# Altium PCB PCB1.PcbDoc
Units mm, origin at the board's own origin, x right, y up, seen from the top; angles counter-clockwise.
Board outline 30 x 40 mm, 2 copper layers (Top Layer, Bottom Layer), stack 1.571 mm thick; 27 components, 28 nets, 104 pads, 15 vias.
Unrouted connection lines stored in the file: 43.
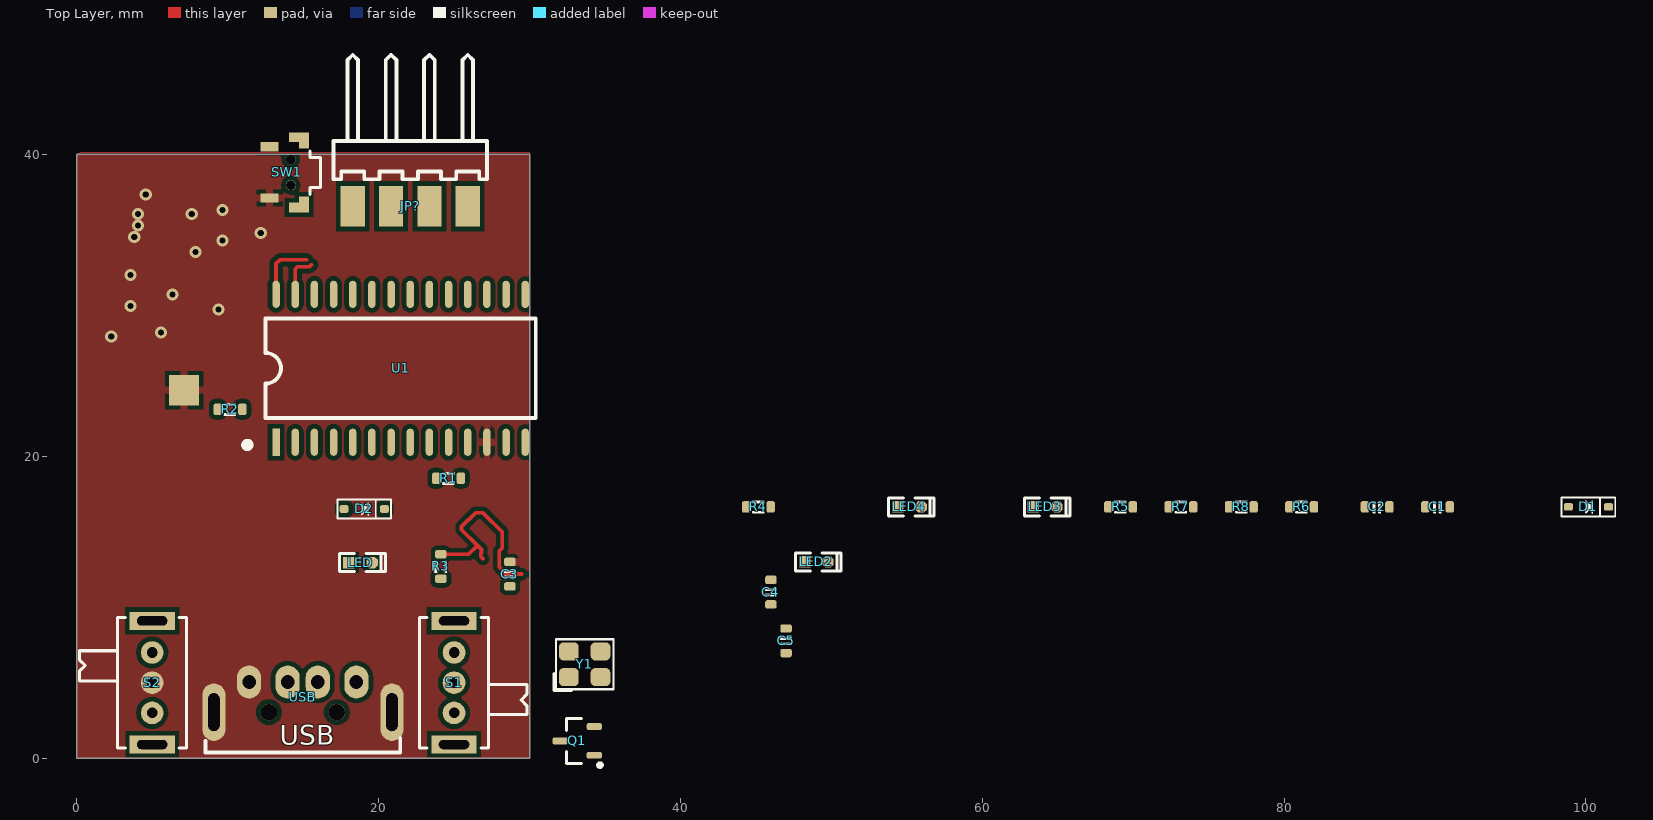
[diagram p0: Top Layer view]
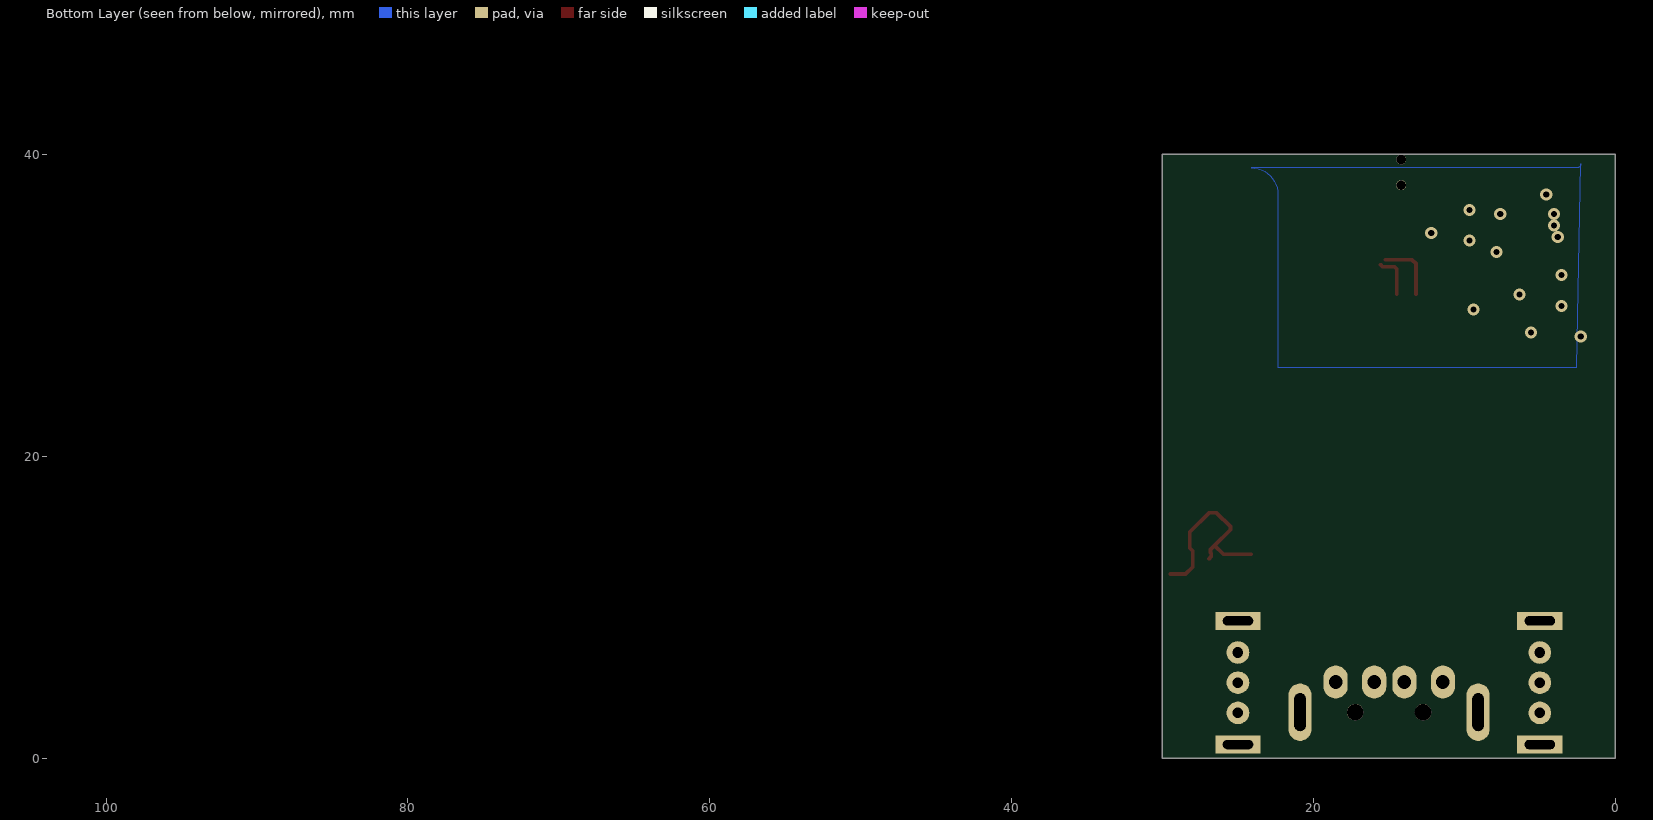
[diagram p1: Bottom Layer view, seen from below]

## Layer stack, top to bottom
Top Solder: solder mask 0.0102, Solder Resist, Dk 3.5
Top Layer: signal copper 0.0356
Dielectric 1: dielectric 1.5, FR-4, Dk 4.8
Bottom Layer: signal copper 0.0356
Bottom Solder: solder mask 0.0102, Solder Resist, Dk 3.5

## Board outline
0,0 30,0 30,40 0,40

## Design rules (kind name [scope] priority, off if disabled: settings)
Clearance Clearance_polygon [InPolygon] p1: gap=0.3 ignorepadtopadclearanceinfootprint=FALSE
Clearance [All] p2: gap=0.2 ignorepadtopadclearanceinfootprint=FALSE
PolygonConnect PolygonConnect_GND [InNet('GND')] p1: thpad.connectstyle=Direct thpad.reliefconductorwidth=0.254 thpad.reliefentries=4 thpad.polygonreliefangle="90 Angle" thpad.airgapwidth=0.254 smdpad.connectstyle=Relief smdpad.reliefconductorwidth=0.508 smdpad.reliefentries=4 smdpad.polygonreliefangle="90 Angle" smdpad.airgapwidth=0.254 via.connectstyle=Direct via.reliefconductorwidth=0.254 via.reliefentries=4 via.polygonreliefangle="90 Angle" via.airgapwidth=0.254
PolygonConnect [All] p2: connectstyle=Relief reliefconductorwidth=0.254 reliefentries=4 polygonreliefangle="90 Angle" airgapwidth=0.254
RoutingVias [All] p1: holewidth=0.711 width=1.27 viastyle="Through Hole" minholewidth=0.711 minwidth=1.27 maxholewidth=0.711 maxwidth=1.27
SolderMaskExpansion [All] p1: expansion=0.102 istentingtop=FALSE
Width [All] p1: maxlimit=0.254 minlimit=0.254 preferedwidth=0.254
30 further rules are at their usual default settings.

## Components (designator, comment, footprint, x,y, rotation, side; value= is the part's Value field where it differs from the comment)
C1 "30pF" "C 0603_L" 90.165,16.647 r0 top
C2 "30pF" "C 0603_L" 86.165,16.647 r0 top
C3 "0.1uF" "C 0603_L" 28.702,12.192 r90 top
C4 "0.1uF" "C 0603_L" 46,11 r90 top
C5 "0.1uF" "C 0603_L" 47,7.777 r90 top
D1 "SS14" SOD-323 100.165,16.647 r0 top
D2 "SS14" SOD-323 19.05,16.51 r0 top
JP? "HDR-1X4" 2.54_WSPIN_4PIN 22.098,36.195 r180 top
LED "蓝色" "LED 0603B" 18.796,12.954 r0 top
LED2 "红色" "LED 0603R" 49,13 r0 top
LED3 "Tx" "LED 0603B" 64.165,16.647 r0 top
LED4 "Rx" "LED 0603B" 55.165,16.647 r0 top
Q1 "SS8050" SOT23-3L 33.147,1.143 r90 top
R1 "2K" "R 0603_L" 24.638,18.542 r0 top
R2 "1K" "R 0603_L" 10.16,23.114 r0 top
R3 "1K" "R 0603_L" 24.13,12.7 r270 top
R4 "300" "R 0603_L" 45.165,16.647 r0 top
R5 "10K" "R 0603_L" 69.165,16.647 r0 top
R6 "10K" "R 0603_L" 81.165,16.647 r0 top
R7 "1K" "R 0603_L" 73.165,16.647 r0 top
R8 "1K" "R 0603_L" 77.165,16.647 r0 top
S1 "SS-12F23" SK-12D07VG3 25,5 r90 top
S2 "SS-12F23" SK-12D07VG3 5,5 r270 top
SW1 "3x6x5" SW_1 13.917,38.812 r270 top
U1 "CH341A" SOP28_L 21.463,25.834 r90 top
USB "USB" USB_A/P_A 14.986,3.048 r0 top
Y1 "12M" "OSC 3225-4P" 33.655,6.223 r0 top

## Footprints (in the part's own frame and the unit in brackets; to place one, negate y for a bottom-side part, rotate by r counter-clockwise, add the part's x,y. Pads: shape width x height; smd on the part's side, far side on the other; paste and mask are expansions set on the pad)
2.54_WSPIN_4PIN [mm]
  rect 1.6x2.7 smd: 1(-3.81,-0.381) 2(-1.27,-0.381) 3(1.27,-0.381) 4(3.81,-0.381)
  silkscreen extent -5.08,-10.41 5.08,-2.16, body extent -5.08,-10.61 5.08,0.89, height 1.61
"C 0603_L" [mil] "无极性贴片电容"
  rrect50% 22x30 smd: 1(-32,0) 2(32,0)
  silkscreen extent -10,-15 10,15, body extent -31,-16 32,16, height 32
"LED 0603B" [mil] "蓝色0603LED"
  rect 30x30 smd: 1(-30.59,0)
  oct 30x30 smd: 2(30.59,0)
  silkscreen extent -54,-24 65,24, body extent -31,-16 32,16, height 24
"LED 0603R" [mil] "红色0603LED"
  rect 30x30 smd: 1(-30.59,-0.01)
  oct 30x30 smd: 2(30.59,-0.01)
  silkscreen extent -54,-24 65,24, body extent -31,-16 32,16, height 24
"OSC 3225-4P" [mm] "3.2*2.5*0.7mm(长宽高)"
  rrect50% 1.3x1.2 smd: 1(-1.05,-0.85) 2(1.05,-0.85) 3(1.05,0.85) 4(-1.05,0.85)
  silkscreen extent -2.03,-1.75 1.91,1.65, body extent -1.6,-1.25 1.6,1.25, height 0.7
"R 0603_L" [mil] "1/10W贴片电阻"
  rrect50% 22x30 smd: 1(-32,0) 2(32,0)
  silkscreen extent -15,-16 15,16, body extent -31,-16 32,16, height 16
SK-12D07VG3 [mm] "侧脚支架小型拨动开关"
  rect 1.2x3 hole 0.6 slot 2 at 90 deg unplated: 0(-4.1,0) 0(4.1,0)
  round 1.5 hole 0.7 unplated: 1(-2,0) 2(0,0) 3(2,0)
  silkscreen extent -4.32,-4.83 4.32,2.29, body extent -4.3,-4.85 4.3,2.25, height 4.75
SOD-323 [mm] "1.8x1.3X0.9mm（长宽高，不包括引脚）"
  rrect50% 0.6x0.5 smd: 1(-1.329,0) 2(1.329,0)
  silkscreen extent -1.78,-0.64 1.78,0.64, body extent -1.32,-0.65 1.33,0.65, height 1
SOP28_L [mm] "17.9*10.6*2.6mm（长宽高）"
  rect 1.8x0.5 smd: 1(-4.9,8.255)
  oval 1.8x0.5 smd: 2(-4.9,6.985) 3(-4.9,5.715) 4(-4.9,4.445) 5(-4.9,3.175) 6(-4.9,1.905) 7(-4.9,0.635) 8(-4.9,-0.635) 9(-4.9,-1.905) 10(-4.9,-3.175) 11(-4.9,-4.445) 12(-4.9,-5.715) 13(-4.9,-6.985) 14(-4.9,-8.255) 15(4.9,-8.255) 16(4.9,-6.985) 17(4.9,-5.715) 18(4.9,-4.445) 19(4.9,-3.175) 20(4.9,-1.905) 21(4.9,-0.635) 22(4.9,0.635) 23(4.9,1.905) 24(4.9,3.175) 25(4.9,4.445) 26(4.9,5.715) 27(4.9,6.985) 28(4.9,8.255)
  silkscreen extent -5.23,-8.95 3.3,10.31, body extent -5.15,-8.95 5.15,8.95, height 2.7
SOT23-3L [mm] "3x1.3x1mm(长宽高)"
  rrect50% 0.45x1 smd: 1(-0.95,-1.143) 2(0.95,-1.143) 3(0,1.125)
  silkscreen extent -1.72,-1.65 1.5,0.7, body extent -1.5,-1.2 1.5,1.2, height 1.05
SW_1 [mm]
  rect 0.65x1.3 smd: 0(-2.325,0.813) 0(2.325,0.813)
  rect 0.4x0.65 smd: 0(-1.8,1.138) 0(1.8,1.138)
  round 0.65 hole 0.65: 0(-0.85,0.263) 0(0.85,0.263)
  rect 0.6x1.2 smd: 1(-1.7,-1.137) 2(1.7,-1.137)
  silkscreen extent -1.43,1.54 1.45,2.24
USB_A/P_A [mm] "A型USB 插头，20*13*4.5mm"
  round 1.1 hole 1.1: 0(-2.25,0) 0(2.25,0)
  oval 1.6x2.2 hole 0.9: 1(3.543,2) 2(0.987,2) 3(-1.013,2) 4(-3.569,2)
  oval 1.524x3.81 hole 0.762 slot 2.5 at 90 deg: 4(-5.9,0) 4(5.9,0)
  silkscreen extent -6.45,-2.67 6.45,-1.7, body extent -6.47,-17.9 6.47,2.1, height 3.25

## Part data
C1 C2 C3 C4 C5: library part C, "无极性贴片电容", BOM名称=无极性贴片电容, 材质=X7R
D1 D2: "肖特基二极管", BOM名称=肖特基二极管, 学习资源=www.ooocke.com, 属性=40V/1A, 版权归属=源创客
JP?: library part "Header 4", "4P接插件", BOM名称=4P接插件, 学习资源=www.ooocke.com, 版权归属=源创客
LED LED2 LED3 LED4: library part LED-SMD, "贴片LED", BOM名称=贴片LED, 学习资源=www.ooocke.com, 版权归属=源创客
Q1: library part 8050-SMD, "高频放大-NPN型", BOM名称=高频放大-NPN型, 学习资源=www.ooocke.com, 属性="40V 1.5A 1W 100MHZ", 版权归属=源创客
R1 R2 R3 R4 R5 R6 R7 R8: library part R, "贴片电阻", BOM名称=贴片电阻, 学习资源=www.ooocke.com, 版权归属=源创客
S1 S2: library part SSW-1P, "1路波动开关", BOM名称=波动开关, 学习资源=www.ooocke.com, 版权归属=源创客
SW1: library part "TSW 3x6", "3x6轻触开关", BOM名称=3x6轻触开关, 学习资源=www.ooocke.com, 版权归属=源创客
U1: library part CH341A_SOP28
USB: library part USB-A/P, "USB-A型公接口", BOM名称=USB-A型公接口, 学习资源=www.ooocke.com, 版权归属=源创客
Y1: library part XTAL-4P, "4脚无源晶振", BOM名称=4脚无源晶振, 学习资源=www.ooocke.com, 版权归属=源创客, 负载电容=CL30pF

## Free pads (board coordinates)
  rect 2x2 smd mask+0.102: 3(7.112,24.384)

## Via types
v1: diameter 0.8, hole 0.4, Top Layer to Bottom Layer, tented both sides, 15 vias

## Nets (pads, with @x,y where several pads share a name; then routed paths per layer and width w, separated by ;. In a path a pad name is that pad's centre, name@x,y a point inside that pad or via, vN(x,y) a via of type N, cw(c..) or ccw(c..) an arc to the next point about the centre after c; other vN are vias at no path point)
3V3: C3.1 C5.2 R5.2 R6.2 R7.2 R8.2 S1.3 U1.9 U1.28 | length 4.2
  Top Layer w0.254: U1.28 13.208,32.766 13.462,33.02 15.24,33.02
5v: D1.2 S1.1
DTR: U1.20
GND: C1.1 C2.1 C3.2 C5.1 LED2.2 pad.3 Q1.2 S2.2 SW1.2 U1.12 USB.4 Y1.2 Y1.4
  other v1: 2.286,27.94 5.588,28.194 9.398,29.718 3.556,29.972 6.35,30.734 3.556,32.004 7.874,33.528 9.652,34.29 3.81,34.544 12.192,34.798 4.064,35.306 4.064,36.068 7.62,36.068 9.652,36.322 4.572,37.338
I2C: R1.1 S2.1
NetC1_2: C1.2 U1.13 Y1.1
NetC2_2: C2.2 U1.14 Y1.3
NetD1_1: D1.1 USB.1
NetD2_1: D2.1 JP?.3
NetJP?_2: JP?.2 R4.1
NetLED2_1: LED2.1 R3.2
NetLED3_1: LED3.1 R7.1
NetLED4_1: LED4.1 R8.1
NetLED_2: LED.2 R2.2
NetQ1_1: Q1.1 R5.1 SW1.1
NetR1_2: R1.2 U1.1
NetR2_1: R2.1 U1.25
NetR3_1: R3.1 U1.26 | length 13.1
  Top Layer w0.254: R3.1 25.959,13.513 26.543,14.097 ; 26.924,13.208 26.775,13.357 26.775,13.567 26.819,13.611 26.819,13.821 26.543,14.097 ; 29.464,12.192 28.474,12.192 27.994,12.672 27.994,13.729 28.194,13.929 28.194,14.986 26.924,16.256 26.416,16.256 25.505,15.345 25.505,15.135 26.543,14.097
NetU1_10: U1.10 USB.3
NetU1_11: U1.11 USB.2
OUT_GND: JP?.1 Q1.3 R6.1
RTS: U1.21
RX: LED4.2 R4.2 U1.6
SCL: U1.24
SDA: U1.23
TX: D2.2 LED3.2 U1.5
UART: S2.3 U1.27 | length 2.9
  Top Layer w0.254: U1.27 14.478,32.417 14.627,32.566 15.428,32.566 15.561,32.699
VCC: JP?.4 S1.2
pads on no net: C4.1 C4.2 LED.1 S1.0 S2.0 SW1.0 U1.2 U1.3 U1.4 U1.7 U1.8 U1.15 U1.16 U1.17 U1.18 U1.19 U1.22 USB.0

## Polygon pours and split planes (outlines as drawn)
GND on Bottom Layer "NONET_L-01_P-001" (solid, remove dead copper, shelved, pour order 1): 2.286,39.37 ccw(c2.54,39.37) 2.54,39.116 24.13,39.116 ccw(c24.13,37.338) 22.352,37.338 22.352,25.908 2.54,25.908
GND on Top Layer "NONET_L-01_P-001" (solid, remove dead copper, pour order 3): 0,0 29.972,0 29.972,40.132 29.845,40.005 0.127,40.005 0,39.878
GND on Top Layer "NONET_L-01_P-001" (solid, remove dead copper, shelved, pour order 2): 0,39.878 0.254,40.132 29.972,40.132 29.972,0 0,0

## Silkscreen, mask and mechanical layers (free items; w line width, h text height)
Mechanical 1:
  the board outline again, w0.2